# Altium PCB RP2040_minimal.PcbDoc
Units mm, origin at the board's own origin, x right, y up, seen from the top; angles counter-clockwise.
Board outline 50 x 50 mm, 2 copper layers (F.Cu, B.Cu); 42 components, 43 nets, 246 pads, 0 vias.
Unrouted connection lines stored in the file: 100.
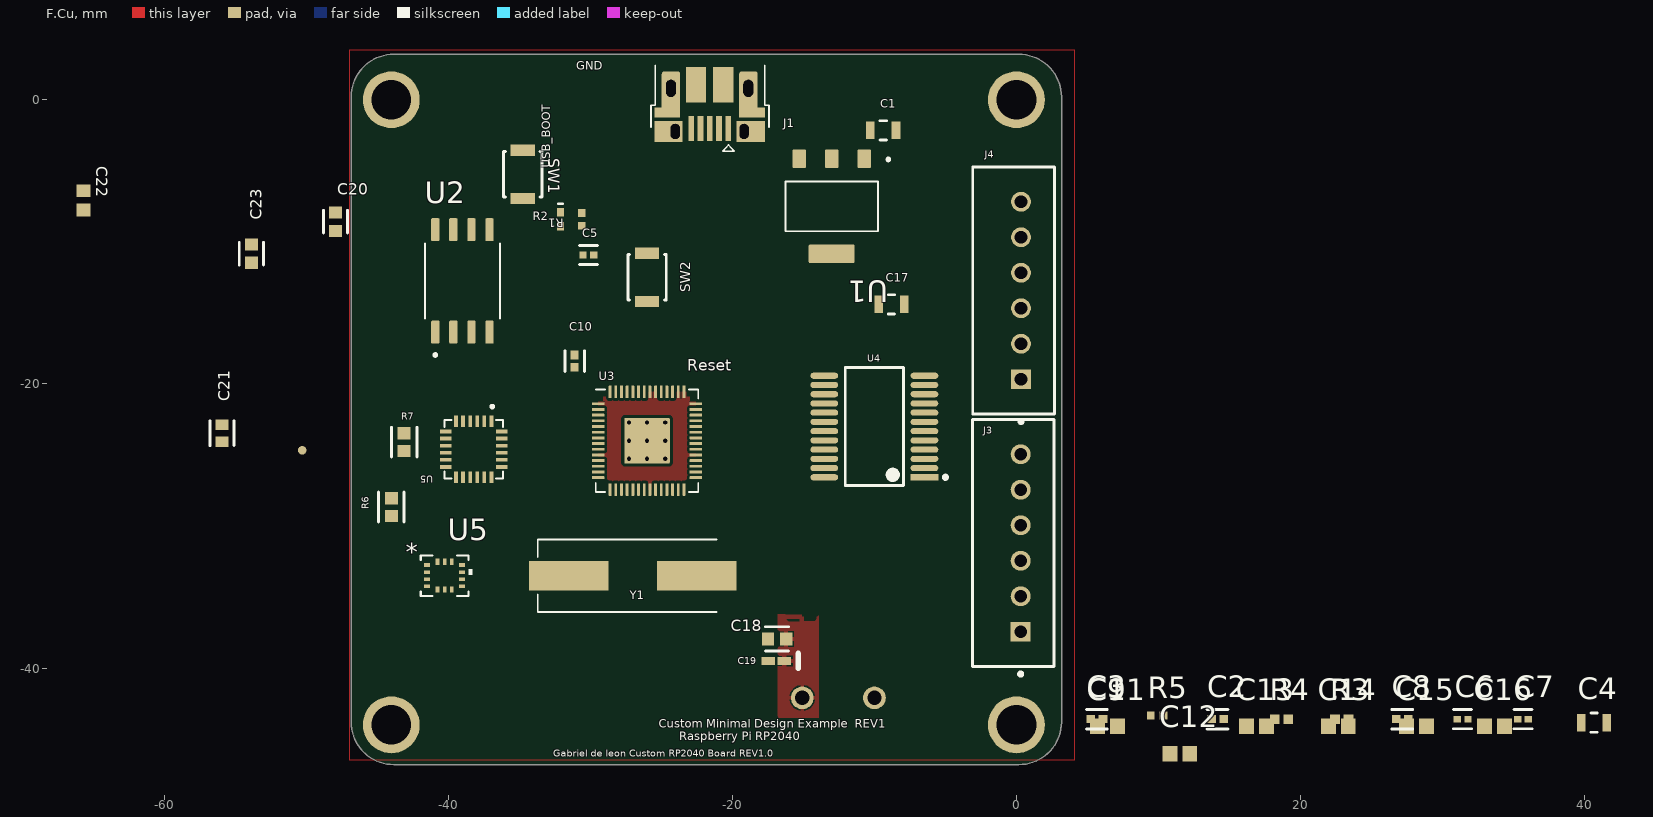
[diagram p0: F.Cu view]
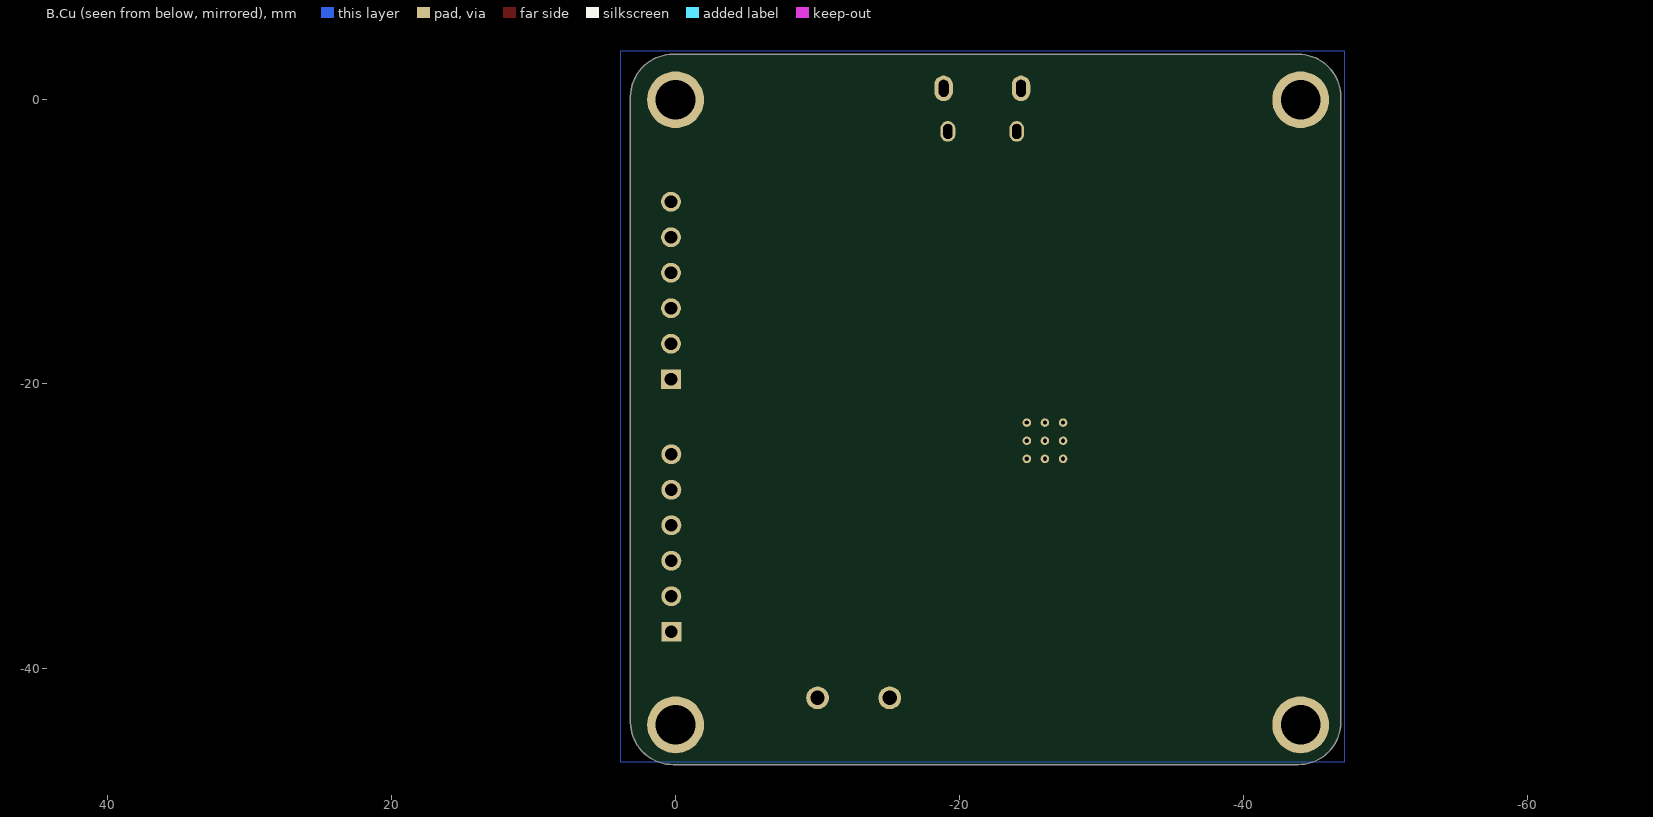
[diagram p1: B.Cu view, seen from below]

## Layer stack, top to bottom
F.Mask: solder mask 0.0102, Solder Resist, Dk 3.5
F.Cu: signal copper 0.0356
Dielectric 1: dielectric 0.32, FR-4, Dk 4.8
B.Cu: signal copper 0.0356
B.Mask: solder mask 0.0102, Solder Resist, Dk 3.5

## Board outline
-46.825,-43.8 -46.825,0.2 cw(c-43.825,0.2) -43.825,3.2 0.175,3.2 cw(c0.175,0.2) 3.175,0.2 3.175,-43.8 cw(c0.175,-43.8) 0.175,-46.8 -43.825,-46.8 cw(c-43.825,-43.8)

## Design rules (kind name [scope] priority, off if disabled: settings)
BoardOutlineClearance [All] p1: gap=0.2 ignorepadtopadclearanceinfootprint=FALSE
Clearance [All] p1: gap=0.2 ignorepadtopadclearanceinfootprint=TRUE except(0: Arc-Text Arc-Hole Track-Text Track-Hole SMDPad-Text SMDPad-Hole THPad-Text THPad-Hole Via-Text Via-Hole Fill-Text Fill-Hole Poly-Text Poly-Hole Region-Text Region-Hole Text-Text Text-Hole; 0.1: Arc-Arc Arc-Track Track-Track)
DiffPairsRouting [All] p1: maxlimit=0.254 minlimit=0.254 mostfreqgap=0.254 toplayer_minwidth=0.381 toplayer_maxwidth=0.381 toplayer_prefwidth=0.381 bottomlayer_minwidth=0.381 bottomlayer_maxwidth=0.381 bottomlayer_prefwidth=0.381 maxuncoupledlength=12.7
HoleSize [All] p1: absolutevalues=TRUE maxlimit=6.3 minlimit=0.3 maxpercent=80.000 minpercent=20.000
MinimumAnnularRing [All] p1: minimumring=0.13
MinimumSolderMaskSliver [All] p1: minsoldermaskwidth=0.098
PolygonConnect "PTH-M3 Connect" [All vs HasFootprint('PTH-M3')] p1: connectstyle=Direct reliefconductorwidth=0.254 reliefentries=4 polygonreliefangle="90 Angle" airgapwidth=0.254
PolygonConnect [All] p2: thpad.connectstyle=Relief thpad.reliefconductorwidth=0.3 thpad.reliefentries=4 thpad.polygonreliefangle="90 Angle" thpad.airgapwidth=0.1 smdpad.connectstyle=Relief smdpad.reliefconductorwidth=0.3 smdpad.reliefentries=4 smdpad.polygonreliefangle="90 Angle" smdpad.airgapwidth=0.1 via.connectstyle=Direct via.reliefconductorwidth=0.254 via.reliefentries=4 via.polygonreliefangle="90 Angle" via.airgapwidth=0.254
RoutingVias [All] p1: holewidth=0.3 width=0.6 viastyle="Through Hole" minholewidth=0.3 minwidth=0.45 maxholewidth=6.35 maxwidth=3
SilkToSilkClearance [All] p1: silktosilkclearance=0.1
SilkToSolderMaskClearance [IsPad] p1: minsilkscreentomaskgap=0 clearancetoexposedcopper=TRUE
SolderMaskExpansion "Tent Vias" [IsVia] p1: expansion=0.102 istentingtop=TRUE
SolderMaskExpansion [All] p2: expansion=0.038 istentingtop=FALSE
Width PowerNets [InNetClass('PowerNets')] p1: maxlimit=0.5 minlimit=0.2 preferedwidth=0.2 minimp=50.000000 maximp=50.000000 favimp=50.000000
Width [All] p2: maxlimit=2 minlimit=0.1 preferedwidth=0.2 minimp=50.000000 maximp=50.000000 favimp=50.000000
25 further rules are at their usual default settings.

## Classes and differential pairs
differential pair USB_D: +USB_D_P -USB_D_N

## Components (designator, comment, footprint, x,y, rotation, side; value= is the part's Value field where it differs from the comment)
C1 "GRM21BR61C106KE15K" FP-GRM21B-0_1-MFG -9.375,-2.15 r0 top
C2 "GCM1555C1H270JA16D" FP-GCM155-0_05-IPC_B 14.16,-43.6 r0 top
C3 "GCM1555C1H270JA16D" FP-GCM155-0_05-IPC_B 5.66,-43.6 r0 top
C4 "GRM21BR61C106KE15K" FP-GRM21B-0_1-MFG 40.66,-43.85 r0 top
C5 "GRM155R71E104KE14J" FP-GRM155-0_05-IPC_C -30.125,-10.925 r180 top
C6 "GRM155R71E104KE14J" FP-GRM155-0_05-IPC_C 31.41,-43.6 r0 top
C7 "GRM155R71E104KE14J" FP-GRM155-0_05-IPC_C 35.66,-43.6 r0 top
C8 "GCM1555C1H270JA16D" FP-GCM155-0_05-IPC_B 27.16,-43.6 r0 top
C9 "0.1uf" CAPC1608X87X45ML20T05 6.41,-44.1 r0 top
C10 "GCM1555C1H270JA16D" FP-GCM155-0_05-IPC_B -31.1,-18.4 r90 top
C11 "0.1uf" CAPC1608X87X45ML20T05 6.41,-44.1 r0 top
C12 "0.1uf" CAPC1608X87X45ML20T05 11.5,-46.025 r0 top
C13 "0.1uf" CAPC1608X87X45ML20T05 16.91,-44.1 r0 top
C14 "0.1uf" CAPC1608X87X45ML20T05 22.66,-44.1 r0 top
C15 "0.1uf" CAPC1608X87X45ML20T05 28.16,-44.1 r0 top
C16 "0.1uf" CAPC1608X87X45ML20T05 33.66,-44.1 r0 top
C17 "GRM21BR61C106KE15K" FP-GRM21B-0_1-MFG -8.8,-14.4 r0 top
C18 "C0603X104K5RACTU" FP-C0603-CJ-MFG -16.85,-37.95 r0 top value=100nF
C19 "TR8M106M010C2000" VISH-TR8-M_L -16.9,-39.5 r180 top
C20 "C0603X104K5RACTU" FP-C0603-CJ-MFG -47.925,-8.575 r270 top value=100nF
C21 "C0603C103J3GACTU" FP-C0603C-CF-MFG -55.925,-23.475 r90 top value="10,000 pF"
C22 "C0603X222K5RACTU" CAPC1608X87X35NL15T15 -65.675,-7.075 r90 top
C23 "C0603X104K5RACTU" FP-C0603-CJ-MFG -53.85,-10.825 r90 top value=100nF
J1 "USB_B_Micro" USB_Micro-B_Amphenol_10103594-0001LF_Horizontal_modified -21.59,0.8 r180 top
J3 "B6B-XH-A(LF)(SN)" FP-B6B-XH-A_LF_SN-MFG -0.225,-31.2 r90 top
J4 "B6B-XH-A(LF)(SN)" FP-B6B-XH-A_LF_SN-MFG -0.2,-13.425 r90 top
R1 "ERJ-2RKF1001X" RESC1005X40X25NL05T05 -30.59,-8.415 r270 top
R2 "DNF" 0402-A -32.09,-8.415 r270 top
R3 "RC0402FR-0727R4L" RESC1005X40X25ML05T10 22.91,-43.6 r0 top
R4 "RC0402FR-0727R4L" RESC1005X40X25ML05T10 18.66,-43.6 r0 top
R5 "ERJ-2RKF1001X" RESC1005X40X25NL05T05 9.91,-43.35 r0 top
R6 "ERA-3AEB103V" FP-ERA3A-IPC_C -44,-28.674 r90 top
R7 "ERA-3AEB103V" FP-ERA3A-IPC_C -43.1,-24.1 r270 top
SW1 "B3U-1000P" FP-B3U-1000P-MFG -34.75,-5.25 r270 top
SW2 "B3U-1000P" FP-B3U-1000P-MFG -26,-12.5 r270 top
U1 "" SOT229P700X180-4N -13,-7.5 r180 top
U2 "cutom W25Q128JVS" SOIC127P790X216-8N -39,-12.75 r90 top
U3 "RP2040" Pico2040-QFN-56 -26,-24 r0 top
U4 "TB6612FNG,C,8,EL" FP-SSOP24-P-300-0_65A-IPC_A -10,-23 r180 top
U5 "Comment" LGA14L_2P59X3P1X0P5_STM-L -40.25,-33.5 r0 top
U5 "MPU-6050" QFN50P400X400X95-24N -38.2,-24.6 r270 top
Y1 "ABLS-12.000MHZ-B4-T" Crystal_SMD_HC49-US -27,-33.5 r0 top

## Footprints (in the part's own frame and the unit in brackets; to place one, negate y for a bottom-side part, rotate by r counter-clockwise, add the part's x,y. Pads: shape width x height; smd on the part's side, far side on the other; paste and mask are expansions set on the pad)
0402-A [mm] "Chip Inductor, Body 1.0x0.5mm, IPC High Density"
  rect 0.6x0.5 smd: 1(-0.5,0) 2(0.5,0)
  silkscreen extent -1.1,-0.15 -1.1,0.15, body extent -0.55,-0.3 0.55,0.3, height 0.55
CAPC1608X87X35NL15T15 [mm] "Chip Capacitor, 2-Leads, Body 1.60x0.80mm, IPC Medium Density"
  rect 0.9x1 smd: 1(-0.675,0) 2(0.675,0)
  body extent -0.87,-0.48 0.87,0.47, height 0.87
CAPC1608X87X45ML20T05 [mm] "Chip Capacitor, 2-Leads, Body 1.60x0.80mm, IPC Low Density"
  rect 1.05x1.1 smd: 1(-0.7,0) 2(0.7,0)
  body extent -0.9,-0.5 0.9,0.5, height 0.87
Crystal_SMD_HC49-US [mm]
  rect 5.6x2.1 smd: 1(-4.5,0) 2(4.5,0)
  silkscreen extent -6.7,-2.55 5.9,2.55
FP-B3U-1000P-MFG [mm]
  rect 0.8x1.7 smd paste+0 mask+0: 1(-1.7,0) 2(1.7,0)
  silkscreen extent -1.6,-1.35 1.6,1.35, body extent -2.2,-1.45 2.2,1.45, height 0.25
FP-B6B-XH-A_LF_SN-MFG [mm]
  rect 1.4x1.4 hole 0.9 paste-1000 mask+0: 1(-6.25,-0.525)
  round 1.4 hole 0.9 paste-1000 mask+0: 2(-3.75,-0.525) 3(-1.25,-0.525) 4(1.25,-0.525) 5(3.75,-0.525) 6(6.25,-0.525)
  silkscreen extent -9.35,-2.88 8.7,2.88, body extent -8.8,-2.98 8.8,2.98, height 0.25
FP-C0603-CJ-MFG [mm]
  rect 0.85x0.9 smd paste+0 mask+0: 1(-0.65,0) 2(0.65,0)
  silkscreen extent -0.8,-0.85 0.8,0.85, body extent -1.2,-0.6 1.2,0.6, height 0.25
FP-C0603C-CF-MFG [mm]
  rect 0.75x0.9 smd paste+0 mask+0: 1(-0.6,0) 2(0.6,0)
  silkscreen extent -0.87,-0.85 0.88,0.85, body extent -1.2,-0.6 1.2,0.6, height 0.25
FP-ERA3A-IPC_C [mm]
  rect 0.855x0.906 smd paste+0 mask+0: 1(-0.626,0) 2(0.626,0)
  silkscreen extent -1.05,-0.9 1.05,0.9, body extent -1.15,-0.6 1.15,0.6, height 0.25
FP-GCM155-0_05-IPC_B [mm]
  rect 0.615x0.572 smd paste+0 mask+0: 1(-0.429,0) 2(0.429,0)
  silkscreen extent -0.74,-0.69 0.74,0.69, body extent -0.89,-0.44 0.89,0.44, height 0.25
FP-GRM21B-0_1-MFG [mm]
  rect 0.6x1.25 smd paste+0 mask+0: 1(-0.9,0) 2(0.9,0)
  silkscreen extent -0.23,-0.67 0.23,0.67, body extent -1.3,-0.77 1.3,0.77, height 0.25
FP-GRM155-0_05-IPC_C [mm]
  rect 0.515x0.472 smd paste+0 mask+0: 1(-0.379,0) 2(0.379,0)
  silkscreen extent -0.64,-0.67 0.64,0.67, body extent -0.74,-0.38 0.74,0.38, height 0.25
FP-SSOP24-P-300-0_65A-IPC_A [mm]
  rect 1.954x0.432 smd paste+0 mask+0: 1(-3.525,3.575)
  rrect100% 1.954x0.432 smd paste+0 mask+0: 2(-3.525,2.925) 3(-3.525,2.275) 4(-3.525,1.625) 5(-3.525,0.975) 6(-3.525,0.325) 7(-3.525,-0.325) 8(-3.525,-0.975) 9(-3.525,-1.625) 10(-3.525,-2.275) 11(-3.525,-2.925) 12(-3.525,-3.575) 13(3.525,-3.575) 14(3.525,-2.925) 15(3.525,-2.275) 16(3.525,-1.625) 17(3.525,-0.975) 18(3.525,-0.325) 19(3.525,0.325) 20(3.525,0.975) 21(3.525,1.625) 22(3.525,2.275) 23(3.525,2.925) 24(3.525,3.575)
  silkscreen extent -5.13,-4.15 2.05,4.15, body extent -5,-4.65 5,4.65, height 0.25
LGA14L_2P59X3P1X0P5_STM-L [mil]
  rect 17x10 smd paste+0 mask+0: 1(-48.5,29.53) 2(-48.5,9.84) 3(-48.5,-9.84) 4(-48.5,-29.53) 8(48.5,-29.53) 9(48.5,-9.84) 10(48.5,9.84) 11(48.5,29.53)
  rect 10x17 smd paste+0 mask+0: 5(-19.68,-38.5) 6(0,-38.5) 7(19.68,-38.5) 12(19.68,38.5) 13(0,38.5) 14(-19.68,38.5)
  silkscreen extent -66,-56 77,56, body extent -61,-51 61,51, height 29
Pico2040-QFN-56 [mm]
  rrect25% 0.875x0.2 smd: 1(-3.437,2.6) 2(-3.437,2.2) 3(-3.437,1.8) 4(-3.437,1.4) 5(-3.437,1) 6(-3.437,0.6) 7(-3.438,0.2) 8(-3.438,-0.2) 9(-3.437,-0.6) 10(-3.437,-1) 11(-3.437,-1.4) 12(-3.437,-1.8) 13(-3.437,-2.2) 14(-3.437,-2.6) 29(3.437,-2.6) 30(3.437,-2.2) 31(3.437,-1.8) 32(3.437,-1.4) 33(3.437,-1) 34(3.437,-0.6) 35(3.438,-0.2) 36(3.438,0.2) 37(3.437,0.6) 38(3.437,1) 39(3.437,1.4) 40(3.437,1.8) 41(3.437,2.2) 42(3.437,2.6)
  rrect25% 0.2x0.875 smd: 15(-2.6,-3.437) 16(-2.2,-3.437) 17(-1.8,-3.437) 18(-1.4,-3.437) 19(-1,-3.437) 20(-0.6,-3.437) 21(-0.2,-3.438) 22(0.2,-3.438) 23(0.6,-3.437) 24(1,-3.437) 25(1.4,-3.437) 26(1.8,-3.437) 27(2.2,-3.437) 28(2.6,-3.437) 43(2.6,3.437) 44(2.2,3.437) 45(1.8,3.437) 46(1.4,3.437) 47(1,3.437) 48(0.6,3.437) 49(0.2,3.438) 50(-0.2,3.438) 51(-0.6,3.437) 52(-1,3.437) 53(-1.4,3.437) 54(-1.8,3.437) 55(-2.2,3.437) 56(-2.6,3.437)
  round 0.6 hole 0.3: 57(-1.275,-1.275) 57(-1.275,0) 57(-1.275,1.275) 57(0,-1.275) 57(0,0) 57(0,1.275) 57(1.275,-1.275) 57(1.275,0) 57(1.275,1.275)
  rrect4% 3.2x3.2 smd: 57(0,0)
  rrect23% 1.084x1.084 on Top Paste: Un1(-0.637,0.637) Un2(-0.637,-0.637) Un3(0.637,0.637) Un4(0.637,-0.637)
  silkscreen extent -3.61,-3.61 3.61,3.61
QFN50P400X400X95-24N [mm]
  rect 0.79x0.26 smd: 1(-1.97,1.25) 2(-1.97,0.75) 3(-1.97,0.25) 4(-1.97,-0.25) 5(-1.97,-0.75) 6(-1.97,-1.25) 13(1.97,-1.25) 14(1.97,-0.75) 15(1.97,-0.25) 16(1.97,0.25) 17(1.97,0.75) 18(1.97,1.25)
  rect 0.26x0.79 smd: 7(-1.25,-1.97) 8(-0.75,-1.97) 9(-0.25,-1.97) 10(0.25,-1.97) 11(0.75,-1.97) 12(1.25,-1.97) 19(1.25,1.97) 20(0.75,1.97) 21(0.25,1.97) 22(-0.25,1.97) 23(-0.75,1.97) 24(-1.25,1.97)
  silkscreen extent -3.1,-2.05 2.05,2.05, body extent -2,-2 2,2, height 0.93
RESC1005X40X25ML05T10 [mm] "Chip Resistor, 2-Leads, Body 1.00x0.50mm, IPC Low Density"
  rect 0.7x0.65 smd: 1(-0.475,0) 2(0.475,0)
  body extent -0.53,-0.27 0.53,0.28, height 0.4
RESC1005X40X25NL05T05 [mm] "Chip Resistor, 2-Leads, Body 1.05x0.55mm, IPC Medium Density"
  rect 0.55x0.55 smd: 1(-0.45,0) 2(0.45,0)
  body extent -0.53,-0.28 0.53,0.28, height 0.4
SOIC127P790X216-8N [mm]
  rrect25% 1.61x0.58 smd: 1(-3.605,1.905) 2(-3.605,0.635) 3(-3.605,-0.635) 4(-3.605,-1.905) 5(3.605,-1.905) 6(3.605,-0.635) 7(3.605,0.635) 8(3.605,1.905)
  silkscreen extent -5.31,-2.64 2.64,2.64, body extent -3.95,-2.64 3.95,2.64, height 2.16
SOT229P700X180-4N [mm]
  rrect15% 0.93x1.31 smd: 1(-2.29,-3.345) 2(0,-3.345) 3(2.29,-3.345)
  rrect15% 3.24x1.31 smd: 4(0,3.345)
  silkscreen extent -4.09,-3.4 3.25,1.75, body extent -3.25,-3.5 3.25,3.5, height 1.8
USB_Micro-B_Amphenol_10103594-0001LF_Horizontal_modified [mm]
  rect 0.4x1.75 smd: 1(-1.3,2.825) 2(-0.65,2.825) 3(0,2.825) 4(0.65,2.825) 5(1.3,2.825)
  rect 1.825x0.7 smd: 6(-2.987,1.7) 6(2.987,1.7)
  rect 2x1.46 smd: 6(-2.9,3.03) 6(2.9,3.03)
  rrect100% 1.3x1.8 hole 0.7 slot 1.2 at 90 deg: 6(-2.725,0) 6(2.725,0)
  rrect30% 1.3x3.25 smd: 6(-2.725,0.425) 6(2.725,0.425)
  rrect100% 1.05x1.45 hole 0.65 slot 1.05 at 90 deg: 6(-2.425,3.03) 6(2.425,3.03)
  rect 1.425x2.5 smd: 6(-0.962,-0.25) 6(0.962,-0.25)
  silkscreen extent -4.18,-1.62 4.13,4.43
VISH-TR8-M_L [mm] "Molded Capacitor, 2-Leads, Body 1.8x1.05mm, IPC High Density"
  rect 0.95x0.55 smd: 1(-0.575,0) 2(0.575,0)
  silkscreen extent -1.55,-0.53 -1.55,0.53, body extent -1.12,-0.53 1.12,0.53, height 0.9

## Part data
C1 C4 C17: library part CMP-2007-03534-2, "Chip Multilayer Ceramic Capacitors for General Purpose, 0805, 10uF, X5R, 15%, 10%, 16V", Capacitance=10uF, Case Code (Imperial)=0805, Case Code (Metric)=2012, Dielectric=X5R, Max Operating Temperature=85°C, Min Operating Temperature=-55°C, Package Quantity=10000, Tolerance=10%, Voltage=16V, Case/Package=0805, Depth=1.25mm, Height=1.25mm, Length=2mm, Mount="Surface Mount", Packaging="Tape and Reel", Radiation Hardening=No, REACH SVHC="No SVHC", Termination=SMD/SMT, Thickness=0.053inch, Voltage Rating=16V, Voltage Rating (DC)=16V, Width=0.049inch
C2 C3 C8 C10: library part CMP-06035-017587-1, "Ceramic Capacitor for Automotive 27pF ±5% 50VDC C0G 0402 Paper T/R", Capacitance=27pF, Case Code (Imperial)=0402, Case Code (Metric)=1005, Dielectric=C0G, Max Operating Temperature=125°C, Min Operating Temperature=-55°C, Package Quantity=10000, Ratings=AEC-Q200, Tolerance=5%, Voltage Rating=50V, Case/Package=0402, Height=0.5mm, Length=0.039inch, Mount="Surface Mount", Packaging="Tape and Reel", Termination=SMD/SMT, Thickness=0.022inch, Voltage Rating (DC)=50V, Weight=0.000212oz, Width=0.02inch
C5 C6 C7: library part CMP-06035-003995-1, "Chip Multilayer Ceramic Capacitors for General Purpose, 0402, 0.10uF, X7R, 15%, 10%, 25V", Capacitance=100nF, Case Code (Imperial)=0402, Case Code (Metric)=1005, Dielectric=X7R, Max Operating Temperature=125°C, Min Operating Temperature=-55°C, Package Quantity=50000, Resistor Type=Ceramic, Tolerance=10%, Voltage Rating=25V, Case/Package=0402, Height=0.5mm, Length=0.039inch, Mount="Surface Mount", Packaging="Tape and Reel", Termination=SMD/SMT, Thickness=0.022inch, Voltage Rating (DC)=25V, Weight=0.000212oz, Width=0.5mm
C9 C11 C12 C13 C14 C15 C16: library part C0603X104J4RACTU, Manufacturer=Kemet, Part Number=C0603X104J4RACTU
C18 C20 C23: library part CMP-2006-03300-2, "CAP CER 0.1UF 50V X7R 0603", Capacitance=100nF, Manufacturer=Kemet, Package=C0603-CJ, Temperature="-55°C to +125°C", Temperature Characteristic=X7R, Temperature Coefficient=15%, Temperature Range High=+125°C, Temperature Range Low=-55°C, Tolerance=10%, Voltage=50V, Automotive=No, Category=Cap, ComponentLink2Description=Datasheet, ComponentLink2URL=https://content.kemet.com/datasheets/KEM_C1013_X7R_FT-CAP_SMD.pdf, Device Class L1="Passive Components", Device Class L2=Capacitors, Device Class L3="Ceramic Capacitors", Digikey Description="CAP CER 0.1UF 50V X7R 0603", Height=0.95mm, Ipc Land Pattern Name=CAPC16080X80, Lead Free=Yes, Manufacturer Part Number=C0603X104K5RACTU, Material=Ceramic, Mouser Description="Capacitor; Ceramic; Cap 0.1uF; Tol+10%; SMT; Flexible Termination; Vol-Rtg 50V; TR", Octopart=https://octopart.com/c0603x104k5ractu-kemet-9145062, RoHS=TRUE, Voltage Rating=50V
C19: library part CMP-2000-07316-1, "Tantalum Capacitor, 10 uF, +/- 20%, 10 V, -55 to 125 degC, 2-Pin SMD (M), RoHS, Tape and Reel", Capacitance=10µF, ESR (Equivalent Series Resistance)=2Ohm, Lifetime @ Temp.=-, Manufacturer=Vishay, Manufacturer Size Code=M, Operating Temperature=-55°C~125°C, Package / Case=0603(1608Metric), Package Description="2-Pin Surface Mount Device, Body 1.6 x 0.85 mm", Package Reference=TR8-M, Standard Package=1, Tolerance=±20%, Voltage - Rated=10V, Catalog Drawings=TR8SeriesTR8SeriesBottom, Category=Capacitors, Datasheet URL=http://www.vishay.com/docs/40114/tr8.pdf, Datasheet Version=03/2016, Family=TantalumCapacitors, Featured Product=TR8SeriesMoldedMicroTan™TantalumChipCapacitors, Features=GeneralPurpose, Height - Seated (Max)="0.035\"(0.89mm)", Lead Spacing=-, Manufacturer URL=http://www.vishay.com/, Mounting Technology=SurfaceMount, Mounting Type=SurfaceMount, Online Catalog=MICROTAN®TR8Series, Other Names=718-1673-6, Packaging=Digi-Reel®, Series=MICROTAN®TR8, Size / Dimension="0.063\"Lx0.033\"W(1.60mmx0.85mm)", Type=Molded
C21: library part CMP-2006-03705-3, "CAP CER 10000PF 25V 5% NP0 0603", Capacitance="10,000 pF", Manufacturer=KEMET, Package=C0603C-CF, Temperature="-55°C to +125°C", Temperature Characteristic=C0G, Temperature Coefficient=30ppm/°C, Temperature Range High=+125°C, Temperature Range Low=-55°C, Tolerance=0.05, Voltage Rating="25 V", Automotive=Yes, Automotive Grade="Grade 1", Category=Cap, ComponentLink2Description=Datasheet, ComponentLink2URL=https://api.kemet.com/component-edge/download/datasheet/C0603C100J5GACAUTO.pdf, Device Class L1="Passive Components", Device Class L2=Capacitors, Device Class L3="Ceramic Capacitors", Digikey Description="CAP CER 10000PF 25V 5% NP0 0603", Height=0.87mm, Lead Free=Yes, Manufacturer Part Number=C0603C103J3GACTU, Material=Ceramic, Mouser Description="0603 C 10nF Ceramic Multilayer Capacitor, 25 V, +125degC, C0G Dielectric, +/-5%", Octopart=https://octopart.com/c0603c103j3gactu-kemet-10686801, RoHS=TRUE
C22: library part CMP-2006-03302-1, Manufacturer=Kemet, Part Number=C0603X222K5RACTU
J3 J4: library part CMP-17439-000076-1, "CONN HEADER VERT 6POS 2.5MM"
R1 R5: library part CMP-1011-00510-4, "Chip Resistor, 1 KOhm, +/- 1%, 100 mW, -55 to 155 degC, 0402 (1005 Metric), RoHS, Tape and Reel", Case Code (Imperial)=0402, Case Code (Metric)=1005, Manufacturer="Basic Passives", Max Operating Temperature="155 degC", Min Operating Temperature="-55 degC", Package Quantity=10000, Power Rating="100 mW", Resistance="1 KOhm", Tolerance=1%, Voltage Rating="50 V", Case\/Package=0402, ComponentLink1Description="Manufacturer URL", ComponentLink1URL=http://www.panasonic.com/, ComponentLink2Description=Datasheet, ComponentLink2URL=http://industrial.panasonic.com/cdbs/www-data/pdf/RDA0000/AOA0000C86.pdf, DatasheetVersion=04/2015, Height="0.35 mm", Length="1 mm", Mount="Surface Mount", Mounting Technology="Surface Mount", PackageDescription="2-Pin Surface Mount Device, Body 1 x 0.5 mm", PackageReference=0402, Packaging="Tape and Reel", PartNumber=ERJ-2RKF1001X, Pins=2, Radiation Hardening=No, REACH SVHC=Yes, RoHSCompliant=true, Width="0.5 mm"
R2: library part R
R3 R4: library part CMP-2002-07553-1, Manufacturer="Yageo / Phycomp", Part Number=RC0402FR-0727R4L
R6 R7: library part CMP-2000-00874-2, "RES SMD 10K OHM 0.1% 1/10W 0603", Case Code (Imperial)=0603, Case Code (Metric)=1608, Max Operating Temperature=155°C, Max Power Dissipation=100mW, Min Operating Temperature=-55°C, Package Quantity=5000, Resistance=10kR, Resistance Tolerance=0.1%, Resistor Type="Thin Film", Temperature Coefficient=25ppm/°C, Voltage Rating=75V, Case/Package=0603, Construction=Rectangular, Contact Plating=Tin, Depth=0.8mm, Height=0.45mm, Lead Free="Lead Free", Length=1.6mm, Military Standard=Not, Mount="Surface Mount", Number of Pins=2, Number of Terminations=2, Packaging="Tape and Reel", Power Rating=100mW, Radiation Hardening=No, REACH SVHC="No SVHC", RoHS Compliant=Yes, Series=ERA-3A, Size Code=0603, Technology="METAL FILM", Termination=SMD/SMT, Tolerance=0.1%, Voltage Rating (DC)=75V, Width=0.8mm
SW1 SW2: library part CMP-2100-03586-2, "SWITCH TACTILE SPST-NO 0.05A 12V", Contact Current Rating=50mA, Contact Resistance=100mR, Insulation Resistance=100MR, Max Operating Temperature=70°C, Max Voltage Rating (DC)=12V, Min Operating Temperature=-25°C, Operating Force=1.5N, Package Quantity=1, Ratings="Dust Proof", Actuator Length=0.4mm, Actuator Type=Standard, Contact Material=Silver, Current Rating=50mA, Depth=2.5mm, Electrical Life=200000Cycles, Height=1.2mm, Illumination Type=Non-Illuminated, Lead Free="Lead Free", Length=4mm, Max Current Rating=50mA, Mechanical Life=200000Cycles, Mount="Surface Mount", Orientation=Straight, Packaging="Tape and Reel", Switch Function=Off-Mom, Switch Travel=0.15mm, Termination=SMD/SMT, Throw Configuration=SPST, Voltage Rating (DC)=12V, Weight=0.000776oz, Width=3mm
U1: library part NCP1117-3.3_SOT223
U2: library part W25Q128JVS
U4: library part CMP-2100-03693-4, "IC MOTOR DRIVER 2.7V-5.5V 24SSOP", Case/Package=SSOP, Max Operating Temperature=85°C, Max Supply Voltage=5.5V, Min Operating Temperature=-20°C, Min Supply Voltage=2.7V, Operating Supply Voltage=3V, Output Current=1A, Package Quantity=1, Interface=Parallel, Logic Function="AND GATE", Mount="Surface Mount", Number of Outputs=2, Number of Pins=24, Packaging="Tape and Reel", Series=-
U5: "MPU-6050 series Accelerometer, Gyroscope, 3 Axis Sensor Evaluation Board", Package="QFN-24 InvenSense", Availability="In Stock", Check_prices=https://www.snapeda.com/parts/MPU-6050/TDK+InvenSense/view-part/?ref=eda, MF="TDK InvenSense", MP=MPU-6050, Price=None, Purchase-URL=https://pricing.snapeda.com/search/part/MPU-6050/?ref=eda, SnapEDA_Link=https://www.snapeda.com/parts/MPU-6050/TDK+InvenSense/view-part/?ref=snap
Y1: library part Crystal

## Free pads (board coordinates)
  round 1.6 hole 1 paste-1000 mask+0: 3(-15.074,-42.1) 3(-9.994,-42.1)
  round 4 hole 2.8 paste-1000 mask+0: 5(0,0) 6(0,-44) 7(-44,-44) 8(-44,0)
  round 0.6 smd paste-1000 mask+0: 9(-50.275,-24.675)

## Nets (pads, with @x,y where several pads share a name; then routed paths per layer and width w, separated by ;. In a path a pad name is that pad's centre, name@x,y a point inside that pad or via, vN(x,y) a via of type N, cw(c..) or ccw(c..) an arc to the next point about the centre after c; other vN are vias at no path point)
+1V1: C6.1 C7.1 C8.1 U3.23 U3.45 U3.50
+3V3: C4.1 C5.1 C9.2 C10.1 C11.2 C12.2 C13.2 C14.2 C15.2 C16.2 C17.1 C21.1 C23.1 J3.5 J4.5 R2.1 R6.1 R7.1 U1.2 U2.8 U3.1 U3.10 U3.22 U3.33 U3.42 U3.43 U3.44 U3.48 U3.49 U4.20 U5.8@-40.17,-23.85 U5.13@-39.45,-26.57
A01: J3.1 U4.1 U4.2
A02: J3.6 U4.5 U4.6
AD0: pad.9 U3.34 U5.9@-40.17,-24.35
AIN1: U3.29 U4.21
AIN2: U3.30 U4.22
BIN1: U3.28 U4.17
BIN2: U3.27 U4.16
BO1: J4.1 U4.11 U4.12
BO2: J4.6 U4.7 U4.8
GND: C1.2 C2.2 C3.2 C4.2 C5.2 C6.2 C7.2 C8.2 C9.1 C10.2 C11.1 C12.1 C13.1 C14.1 C15.1 C16.1 C17.2 C18.1 C19.2 C20.2 C21.2 C22.2 C23.2 J1.5 J1.6 J3.2 J4.2 pad.3@-9.994,-42.1 SW1.1 SW2.1 U1.1 U2.4 U3.19 U3.57 U4.3 U4.4 U4.9 U4.10 U4.18 U5.18
INT: U3.5 U5.12@-40.17,-25.85
MA1: J3.4 U3.15
MA2: J4.4 U3.32
MB1: J3.3 U3.16
MB2: J4.3 U3.31
NetC3_1: C3.1 R5.1 Y1.2
NetC20_1: C20.1 U5.10@-40.17,-24.85
NetC22_1: C22.1 U5.20
NetR3_1: R3.1 U3.47
NetR4_1: R4.1 U3.46
PWMA: U3.17 U4.23
PWMB: U3.18 U4.15
QSPI_SCLK: U2.6 U3.52
QSPI_SD0: U2.5 U3.53
QSPI_SD1: U2.2 U3.55
QSPI_SD2: U2.3 U3.54
QSPI_SD3: U2.7 U3.51
QSPI_SS: R1.2 R2.2 U2.1 U3.56
RUN: SW2.2 U3.26
SCL: R6.2 U3.7 U5.23
SDA: R7.2 U3.6 U5.24
STBY: U3.8 U4.19
SWCLK: U3.24
SWD: U3.25
U\S\B\_\B\O\O\T\: R1.1 SW1.2
USB_D_N: J1.2 R4.2
USB_D_P: J1.3 R3.2
VBUS: C1.1 J1.1 U1.3
VM: C18.2 C19.1 pad.3@-15.074,-42.1 U4.13 U4.14 U4.24
XIN: C2.1 U3.20 Y1.1
XOUT: R5.2 U3.21
pads on no net: J1.4 U1.4 U3.2 U3.3 U3.4 U3.9 U3.11 U3.12 U3.13 U3.14 U3.35 U3.36 U3.37 U3.38 U3.39 U3.40 U3.41 U3.Un1 U3.Un2 U3.Un3 U3.Un4 U5.1 U5.2 U5.3 U5.4 U5.5 U5.6 U5.7 U5.8@-39.018,-34.25 U5.9@-39.018,-33.75 U5.10@-39.018,-33.25 U5.11 U5.12@-39.75,-32.522 U5.13@-40.25,-32.522 U5.14 U5.15 U5.16 U5.17 U5.19 U5.21 U5.22

## Polygon pours and split planes (outlines as drawn)
+3V3 on F.Cu "+3V3_L01_P015" (solid, pour order 15): -29.1,-20.9 -29.1,-27.1 -23,-27.1 -23,-20.9
+3V3 on F.Cu "F.Cu-+3V3-1" (solid, remove dead copper, shelved, pour order 14): 4.079,-46.492 -46.921,-46.492 -46.921,3.508 4.079,3.508
VM on F.Cu "VM_L01_P004" (solid, pour order 4): -16.788,-36.2 -13.9,-36.2 -13.9,-43.5 -16.812,-43.5
GND on B.Cu "B.Cu-GND" (solid, remove dead copper, shelved, pour order 7): 3.91,-46.6 -47.09,-46.6 -47.09,3.4 3.91,3.4

## Silkscreen, mask and mechanical layers (free items; w line width, h text height)
F.SilkS:
  text "GND" at -30.978,1.916 h1
  text "USB_BOOT" at -32.6,-4.8 h1 r90
  text "Reset" at -23.175,-19.075 h0.8
  text "Custom Minimal Design Example  REV1" at -25.175,-44.4 h1
  text "Raspberry Pi RP2040" at -23.725,-45.3 h1
  text "Gabriel de leon Custom RP2040 Board REV1.0" at -32.585,-46.26 h0.5

## Text inside footprints (layer, text, board x,y; h text height)
J1: Dwgs.User "PCB edge" at -22.113,1.729 h0.5
U5: F.SilkS "*" at -43,-32.5 h1.27; Top 3D Body "*" at -41.584,-33.135 h1.27